# EAGLE board micrcocontroller-ATSAMD11C14A (EAGLE 9.3.1)
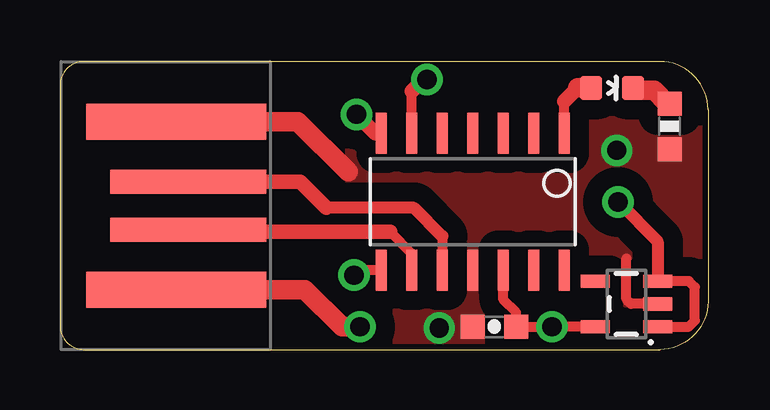
[diagram p0: board, top side]
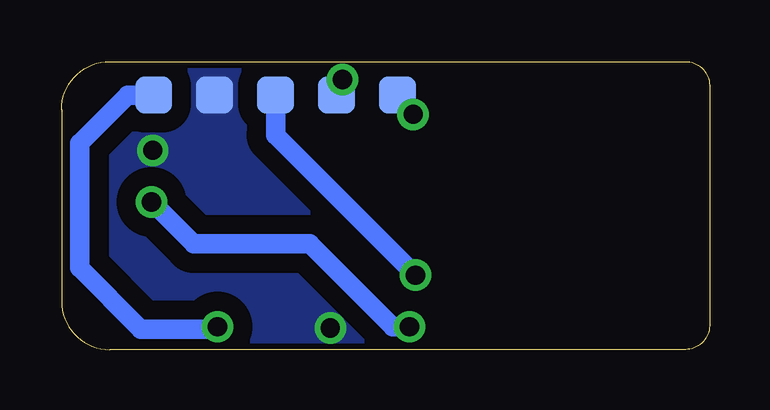
[diagram p1: board, bottom side, seen from below]

Size 27 x 12 mm. Coordinates in mm from the lower left corner, seen from the top.
Outline: 0.98,0 1,0
Outline: 1,0 25,0 arc90 27,2 27,10 arc90 25,12 1,12 arc90 0,11 0,1 arc90 1,0
Copper layers (1*16): Top 0.035mm / dielectric 1.5mm / Bottom 0.035mm
Design rules "Endmill-1-32-Bantam": minimum track width 16mil, minimum drill 0.8mm, track to track 0.8mm, track to pad 0.8mm, pad to pad 0.8mm, via to via 0.8mm, smd to smd 0mil, copper to edge 1mil, drill to drill 1mil, minimum pad ring 10mil, minimum via ring 10mil, stop-mask expansion 1mil, vias tented up to drill 30mil, thermal gap 10mil

## Footprints (pad centres in the part's own frame; a part is rotated, then mirrored left to right if it is on the bottom)
0603-CAP = smd 1 x 1: 1 -0.9,0; 2 0.9,0
LED-0603 = smd 1 x 0.9: A 0,-0.877; C 0,0.877
0603-RES = smd 1 x 1: 1 -0.95,0; 2 0.95,0
SOIC14 = smd 0.45 x 1.708: 1 -3.81,-2.854; 2 -2.54,-2.854; 3 -1.27,-2.854; 4 0,-2.854; 5 1.27,-2.854; 6 2.54,-2.854; 7 3.81,-2.854; 8 3.81,2.854; 9 2.54,2.854; 10 1.27,2.854; 11 0,2.854; 12 -1.27,2.854; 13 -2.54,2.854; 14 -3.81,2.854
TESTPOINT-5 = smd 1.524 x 1.524: 1 0,0; 2 2.54,0; 3 5.08,0; 4 7.62,0; 5 10.16,0
USB-A-PCB = smd 7.5 x 1.5: 5V -0.2,-3.5; GND -0.2,3.5 | smd 6.5 x 1: USB_M 0.3,-1; USB_P 0.3,1
SOT23-5 = smd 0.55 x 1.2: 1 -0.95,-1.3; 2 0,-1.3; 3 0.95,-1.3; 4 0.95,1.3; 5 -0.95,1.3

## Placement (x,y rotation side)
C2  0.1uF  [0603-CAP]  18.1,0.95 180 top
LED1  blue  [LED-0603]  23,10.9 270 top
R2  220  [0603-RES]  25.4,9.3 90 top
U2  ATSAMD11C14-  [SOIC14]  17.2,6.15 180 top
U$1  HEADER-5-TESTPOINT  [TESTPOINT-5]  13,10.6 180 bottom
U$2  USB_CONN_UNSHIELDED  [USB-A-PCB]  5.05,6 0 top
U$3  REGULATOR3.3V-0.5A-MIC5219  [SOT23-5]  23.6,1.9 90 top

## Library data of the parts
C2 LED1 R2 U2 U$1-U$3 = homemade-hardware

## Nets
5V: U$2.5V U$3.1 U$3.3
GND: C2.2 R2.1 U2.11 U$1.4 U$2.GND U$3.2
LED: LED1.A U2.1
N$2: LED1.C R2.2
RESET: U2.6 U$1.2
SWDCLK: U2.7 U$1.1
SWDIO: U2.8 U$1.3
USB_D+: U2.10 U$2.USB_P
USB_D-: U2.9 U$2.USB_M
VCC: C2.1 U2.12 U$1.5 U$3.5

## Tracks (layer width: path | path; a pad name or v marks a point on that pad's centre or on a via)
5V  (via drill 0.8)
  Top 0.406: U$3.1 26.2,0.95 26.45,1.2 26.45,2.6 26.2,2.85 U$3.3
  Top 0.508: v23.25,6.15 24.9,4.5 U$3.3
  Top 0.813: U$2.5V 10.2,2.5 11.75,0.95 v12.5,0.95
  Bottom 0.813: v23.25,6.15 21.5,4.4 16.65,4.4 13.2,0.95 v12.5,0.95
GND  (via drill 0.8)
  Top 0.406: U$3.2 23.8,1.9 23.6,2.1 23.6,3.8
  Top 0.813: U$2.GND 9.9,9.5 12,7.4
  other vias: 23.2,8.3 15.8,0.9
  pour Top (isolate 0.254, no thermals): 12,14 28,14 28,-1 12,-1
  pour Bottom (isolate 0.254, no thermals): 12,15 29,15 29,-2 12,-2
LED
  Top 0.406: U2.1 21.01,10.34
  Top 0.61: 21.57,10.9 21.01,10.34
  Top 0.813: LED1.A 21.57,10.9
N$2
  Top 0.406: R2.2 25.3,10.25 | LED1.C 23.98,10.8
  Top 0.813: 25.3,10.25 24.75,10.8 23.98,10.8
RESET  (via drill 0.8)
  Top 0.406: U2.6 14.66,10.76
  Top 0.61: 14.66,10.76 15.15,11.25 v15.29,11.25
  Bottom 0.813: U$1.2 15.54,11 v15.29,11.25
SWDCLK  (via drill 0.8)
  Top 0.406: U2.7 13.15,9
  Top 0.61: 13.15,9 v12.35,9.8
  Bottom 0.406: U$1.1 12.35,9.95 v12.35,9.8
SWDIO  (via drill 0.8)
  Top 0.406: U2.8 12.45,3.3 v12.25,3.1
  Bottom 0.813: U$1.3 18.08,8.93 v12.25,3.1
USB_D+
  Top 0.406: 15.93,4.72 U2.10
  Top 0.508: 15.93,4.72 14.75,5.9 11.1,5.9
  Top 0.61: 11.1,5.9 10,7 U$2.USB_P
USB_D-
  Top 0.406: U2.9 14.66,3.99 13.75,4.9
  Top 0.508: U$2.USB_M 5.45,4.9
  Top 0.61: 13.75,4.9 5.45,4.9
VCC  (via drill 0.8)
  Top 0.406: U$3.5 v20.5,0.95 C2.1 19,1.55 18.47,2.08 U2.12
  Bottom 0.406: 20.6,0.85 v20.5,0.95
  Bottom 0.813: U$1.5 24.25,10.6 26.25,8.6 26.25,3.4 23.7,0.85 20.6,0.85